# Altium PCB LPCB223R0.PcbDoc
Units mm, origin at the board's own origin, x right, y up, seen from the top; angles counter-clockwise.
Board outline 207.5 x 165.7 mm, 2 copper layers (Top Layer, Bottom Layer); 61 components, 43 nets, 301 pads, 42 vias.
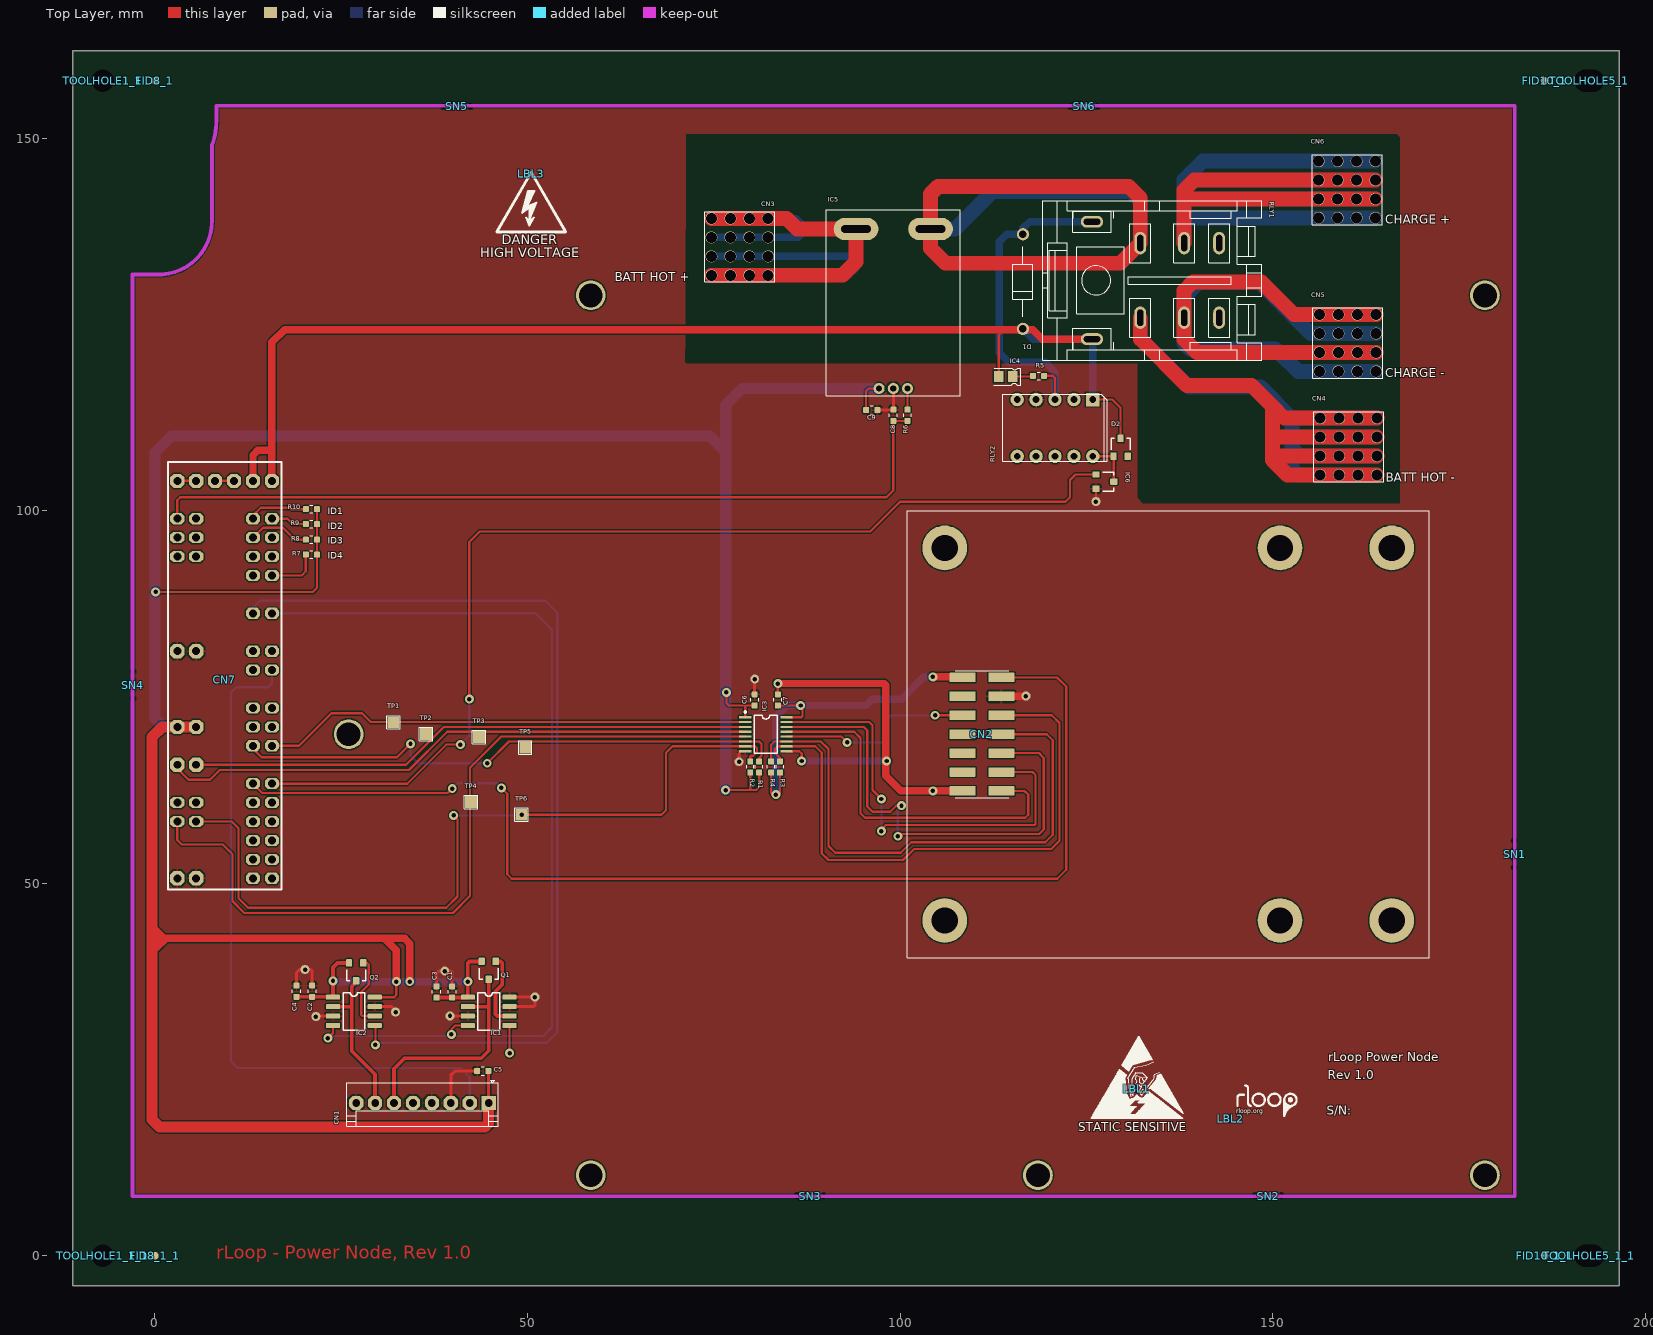
[diagram p0: Top Layer view]
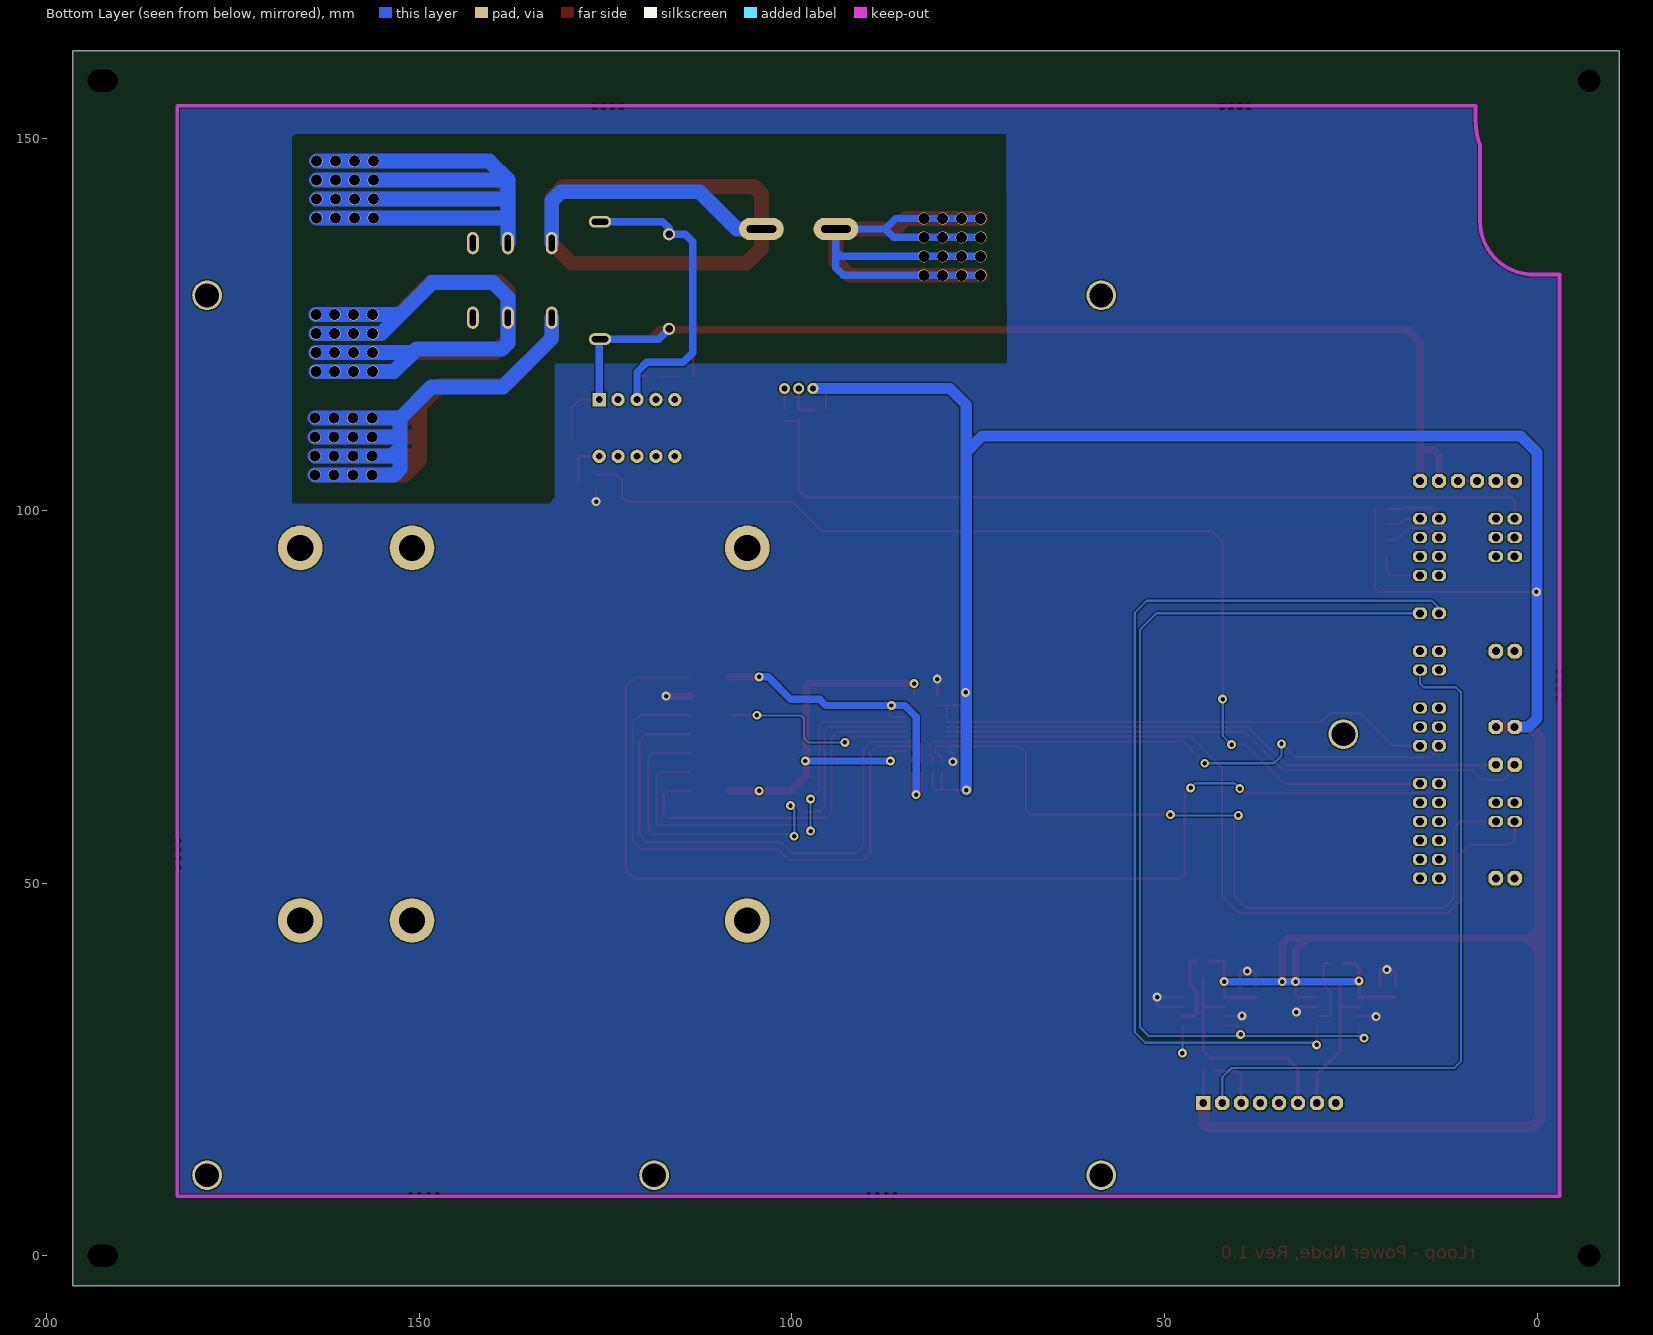
[diagram p1: Bottom Layer view, seen from below]

## Layer stack, top to bottom
Top Layer: signal copper 0.0356
Dielectric: core 0.32, FR-4, Dk 4.8
Bottom Layer: signal copper 0.0356

## Board outline
-11,-4 196.5,-4 196.5,161.695 -11,161.695

## Design rules (kind name [scope] priority, off if disabled: settings)
Clearance [All] p1: gap=0.16
HoleSize [All] p1: absolutevalues=TRUE maxlimit=5 minlimit=0.025 maxpercent=80.000 minpercent=20.000
MinimumSolderMaskSliver [All] p1 off: minsoldermaskwidth=0.1
PlaneClearance [All] p1: clearance=0.6
PolygonConnect [IsVia] p1: connectstyle=Direct reliefconductorwidth=0.254 reliefentries=4 polygonreliefangle="90 Angle" airgapwidth=0.254
PolygonConnect PolygonConnect_1 [All] p2: connectstyle=Relief reliefconductorwidth=0.254 reliefentries=4 polygonreliefangle="90 Angle" airgapwidth=0.254
RoomDefinition "LPCB223 - OVERVIEW" [InComponentClass('LPCB223 - OVERVIEW')] p1: confinementstyle=ConfineIn formatcopy=TRUE lockcomponents=FALSE outline -79.611,-126.179 -28.811,-126.179 -28.811,-100.779 -79.611,-100.779
RoomDefinition "U_LPCB223 - CHARGER IF" [InComponentClass('U_LPCB223 - CHARGER IF')] p2: confinementstyle=ConfineIn formatcopy=TRUE lockcomponents=FALSE outline -79.611,-126.179 -28.811,-126.179 -28.811,-100.779 -79.611,-100.779
RoomDefinition "U_LPCB223 - 24V POWER" [InComponentClass('U_LPCB223 - 24V POWER')] p3: confinementstyle=ConfineIn formatcopy=TRUE lockcomponents=FALSE outline -79.611,-126.179 -28.811,-126.179 -28.811,-100.779 -79.611,-100.779
RoomDefinition "U_LPCB223 - CORE INTERFACE" [InComponentClass('U_LPCB223 - CORE INTERFACE')] p4: confinementstyle=ConfineIn formatcopy=TRUE lockcomponents=FALSE outline -79.611,-126.179 -28.811,-126.179 -28.811,-100.779 -79.611,-100.779
RoomDefinition "U_LPCB223 - BMS INTERFACE" [InComponentClass('U_LPCB223 - BMS INTERFACE')] p5: confinementstyle=ConfineIn formatcopy=TRUE lockcomponents=FALSE outline -79.611,-126.179 -28.811,-126.179 -28.811,-100.779 -79.611,-100.779
RoomDefinition "U_LPCB223 - 1 WIRE DRIVER" [InComponentClass('U_LPCB223 - 1 WIRE DRIVER')] p6: confinementstyle=ConfineIn formatcopy=TRUE lockcomponents=FALSE outline -79.611,-126.179 -28.811,-126.179 -28.811,-100.779 -79.611,-100.779
RoutingVias [All] p1: holewidth=0.6 width=1.2 viastyle="Through Hole" minholewidth=0.6 minwidth=1.2 maxholewidth=1 maxwidth=3
SilkToSilkClearance [All] p1 off: silktosilkclearance=0.254
SilkToSolderMaskClearance [IsPad] p1 off: minsilkscreentomaskgap=0.254 clearancetoexposedcopper=TRUE
SolderMaskExpansion [All] p1: expansion=0.102
Width [All] p1: maxlimit=2 minlimit=0.254 preferedwidth=0.254
23 further rules are at their usual default settings.

## Classes and differential pairs
component class "U_LPCB223 - CORE INTERFACE": CN7 R7 R8 R9 R10
component class "U_LPCB223 - CHARGER IF": C8 C9 CN3 CN4 CN5 CN6 D1 D2 IC4 IC5 IC6 R5 R6 RLY1 RLY2
component class "U_LPCB223 - BMS INTERFACE": C6 C7 CN2 IC3 R1 R2 R3 R4 TP1 TP2 TP3 TP4 TP5 TP6
component class "U_LPCB223 - 24V POWER": CN1
component class "U_LPCB223 - 1 WIRE DRIVER": C1 C2 C3 C4 C5 IC1 IC2 Q1 Q2
component class "LPCB223 - OVERVIEW": LBL1 LBL2 SN1 SN2 SN3 SN4 SN5 SN6

## Components (designator, comment, footprint, x,y, rotation, side; value= is the part's Value field where it differs from the comment)
C1 "100n / 50V / 10% / SMD 0603" LFP011__CC1608-0603-IPC7351_B 39.9,35.4 r90 top
C2 "100n / 50V / 10% / SMD 0603" LFP011__CC1608-0603-IPC7351_B 21.1,35.5 r90 top
C3 "1uF / 10V / 10% / SMD 0603" LFP011__CC1608-0603-IPC7351_B 37.8,35.4 r90 top
C4 "1uF / 10V / 10% / SMD 0603" LFP011__CC1608-0603-IPC7351_B 19,35.5 r90 top
C5 "1uF / 10V / 10% / SMD 0603" LFP011__CC1608-0603-IPC7351_B 44,24.8 r180 top
C6 "100n / 50V / 10% / SMD 0603" LFP011__CC1608-0603-IPC7351_B 80.5,74.6 r90 top
C7 "100n / 50V / 10% / SMD 0603" LFP011__CC1608-0603-IPC7351_B 83.6,74.6 r90 top
C8 "10pF / 50V / 5% / SMD 0603" LFP011__CC1608-0603-IPC7351_B 99.1,112.8 r90 top
C9 "100nF / 50V / 10% / SMD 0603" LFP011__CC1608-0603-IPC7351_B 96.2,113.5 r0 top
CN1 "640456-8" 640456-8 35.9,20.5 r180 top
CN2 "1241050-7" 1241050-7 111,70 r90 top locked
CN3 "7461383" 7461383 78.5,135.4 r0 top
CN4 "7461383" 7461383 160.2,108.6 r0 top
CN5 "7461383" 7461383 160.1,122.5 r0 top
CN6 "7461383" 7461383 160,143.1 r0 top
CN7 "RLOOP_NODE_CORE" RLOOP_NODE_CORE 3,104 r270 top locked
D1 "1N4004" DO-41 116.5,137.1 r270 top
D2 "BAS16" LFP021__SOT23 129.6,108.5 r0 top
FID8_1 "FIDUCIAL" FIDTOP 0,157.695 r0 top
FID8_1_1 "FIDUCIAL" FIDTOP 0,0 r0 top
FID10_1 "FIDUCIAL" FIDTOP 186.5,157.695 r0 top
FID10_1_1 "FIDUCIAL" FIDTOP 186.5,0 r0 top
IC1 "DS2482S-100+T&R" LFP069__R-8G 44.8,32.8 r270 top
IC2 "DS2482S-100+T&R" LFP069__R-8G 26.7,32.8 r270 top
IC3 "MAX14850AEE+" LFP137__PW016 82,70 r270 top
IC4 "EL-17-21VGC/TR8" CR2012-0805-LED 114.2,118 r180 top
IC5 "ACS759LCB-050B-PFF-T" CB-PFF 99.1,116.4 r0 top
IC6 "NUD3124LT1G" LFP021__SOT23 127.5,103.9 r270 top
LBL1 "STATIC LABEL" STATIC_LABEL 131.8,22.4 r0 top
LBL2 "RLOOP_LOGO" RLOOP_LOGO 144.4,18.4 r0 top
LBL3 "MAINS POWER LABEL" "MAINS POWER LABEL" 50.5,145.2 r0 top (schematic designator LBL1)
Q1 "BSS84" LFP021__SOT23 44.8,38.3 r180 top
Q2 "BSS84" LFP021__SOT23 27,38.1 r180 top
R1 "10K / 0.1W / 1% / SMD 0603" LFP020__CR1608-0603-IPC7351_B 81.1,65.6 r270 top
R2 "10K / 0.1W / 1% / SMD 0603" LFP020__CR1608-0603-IPC7351_B 79.9,65.6 r270 top
R3 "10K / 0.1W / 1% / SMD 0603" LFP020__CR1608-0603-IPC7351_B 83.9,65.6 r270 top
R4 "10K / 0.1W / 1% / SMD 0603" LFP020__CR1608-0603-IPC7351_B 82.7,65.6 r270 top
R5 "4.7K / 0.1W / 1% / SMD 0603" LFP020__CR1608-0603-IPC7351_B 118.6,118.1 r180 top
R6 "47R / 0.1W / 1% / SMD 0603" LFP020__CR1608-0603-IPC7351_B 101,112.8 r90 top
R7 "0R / 0.1W / SMD 0603" LFP020__CR1608-0603-IPC7351_B 21,94.1 r0 top
R8 "0R / 0.1W / SMD 0603" LFP020__CR1608-0603-IPC7351_B 21,96.1 r0 top
R9 "0R / 0.1W / SMD 0603" LFP020__CR1608-0603-IPC7351_B 21,98.2 r0 top
R10 "0R / 0.1W / SMD 0603" LFP020__CR1608-0603-IPC7351_B 21,100.2 r0 top
RLY1 "K10P-11D15-24" K10P-11D15-24 134.3,130.9 r270 top
RLY2 "TQ2-24" TQ2 120.8,111.1 r180 top
SN1 "PCB_SNAPOUT" SNAPOUT_NEW 182.5,52.1 r90 top
SN2 "PCB_SNAPOUT" SNAPOUT_NEW 151.2,8 r180 top
SN3 "PCB_SNAPOUT" SNAPOUT_NEW 89.75,8 r180 top
SN4 "PCB_SNAPOUT" SNAPOUT_NEW -3,74.8 r90 top
SN5 "PCB_SNAPOUT" SNAPOUT_NEW 42.3,154.3 r180 top
SN6 "PCB_SNAPOUT" SNAPOUT_NEW 126.5,154.3 r180 top
TOOLHOLE1_1 "Comment" TOOL-1#1 -7,157.695 r0 top
TOOLHOLE1_1_1 "Comment" TOOL-1#1 -7,0 r0 top
TOOLHOLE5_1 "Comment" TOOL-1#2 192.5,157.695 r0 top
TOOLHOLE5_1_1 "Comment" TOOL-1#2 192.5,0 r0 top
TP1 "SMD_TP" SMD-TP 32,71.6 r0 top
TP2 "SMD_TP" SMD-TP 36.4,70 r0 top
TP3 "SMD_TP" SMD-TP 43.5,69.6 r0 top
TP4 "SMD_TP" SMD-TP 42.4,60.9 r0 top
TP5 "SMD_TP" SMD-TP 49.7,68.2 r0 top
TP6 "SMD_TP" SMD-TP 49.2,59.2 r0 top

## Footprints (in the part's own frame and the unit in brackets; to place one, negate y for a bottom-side part, rotate by r counter-clockwise, add the part's x,y. Pads: shape width x height; smd on the part's side, far side on the other; paste and mask are expansions set on the pad)
640456-8 [mm] "Connector, Male Header, 8 Way"
  rect 1.905x1.905 hole 1.02: 1(-8.89,0)
  oct 1.905x1.905 hole 1.02: 2(-6.35,0) 3(-3.81,0) 4(-1.27,0) 5(1.27,0) 6(3.81,0) 7(6.35,0) 8(8.89,0)
  silkscreen extent -10.15,-3.04 10.17,3.1
1241050-7 [mm]
  rrect10% 1.27x3.5 smd paste-0.01: 1(-7.62,-2.605) 2(-7.62,2.605) 3(-5.08,-2.605) 4(-5.08,2.605) 5(-2.54,-2.605) 6(-2.54,2.605) 7(0,-2.605) 8(0,2.605) 9(2.54,-2.605) 10(2.54,2.605) 11(5.08,-2.605) 12(5.08,2.605) 13(7.62,-2.605) 14(7.62,2.605)
  silkscreen extent -8.54,-3.6 8.54,3.6
7461383 [mm]
  round 1.6 hole 1.48: 1(-3.81,-3.81) 1(-3.81,-1.27) 1(-3.81,1.27) 1(-3.81,3.81) 1(-1.27,-3.81) 1(-1.27,-1.27) 1(-1.27,1.27) 1(-1.27,3.81) 1(1.27,-3.81) 1(1.27,-1.27) 1(1.27,1.27) 1(1.27,3.81) 1(3.81,-3.81) 1(3.81,-1.27) 1(3.81,1.27) 1(3.81,3.81)
  silkscreen extent -4.7,-4.7 4.7,4.7
CB-PFF [mm]
  round 1.5 hole 0.85: 1(-1.91,0) 2(0,0) 3(1.91,0)
  oval 6x3 hole 1 slot 4 at 0 deg: A(-5,21.4) B(5,21.4)
  silkscreen extent -9,-1 9,24
CR2012-0805-LED [mm]
  rect 1.3x1.5 smd: A(0.95,0) K(-0.95,0)
  silkscreen extent -2.01,-1.14 1.63,1.14
DO-41 [mil]
  round 65 hole 40: A(0,0) K(500,0)
  silkscreen extent 65,-53 435,53
FIDTOP [mil]
  round 40 smd mask+39.37: 1(0,0)
K10P-11D15-24 [mm]
  oval 3x1.6 hole 0.8 slot 2.2 at 0 deg: 1(5.005,8.535) 2(-5.005,8.535) 3(5.005,3.835) 4(-5.005,3.835) 5(5.005,-2.055) 6(-5.005,-2.055)
  oval 1.6x3 hole 0.8 slot 2.2 at 90 deg: A(7.875,-8.535) B(-7.875,-8.535)
  silkscreen extent -10.73,-15.17 10.71,14.24
LFP011__CC1608-0603-IPC7351_B [mm]
  rrect25% 0.8x0.8 smd: 1(-0.75,0) 2(0.75,0)
  silkscreen extent -0.2,-0.55 0.2,0.55
LFP020__CR1608-0603-IPC7351_B [mm]
  rrect25% 0.8x0.8 smd: 1(-0.75,0) 2(0.75,0)
  silkscreen extent -0.2,-0.5 0.2,0.5
LFP021__SOT23 [mm] "SOT-23; 3 Leads; Body 3.0 x 2.5 mm, inc. leads (LxW max)"
  rrect25% 0.85x1 smd paste-0.05: 1(-0.95,-1.2) 2(0.95,-1.2) 3(0,1.2)
  silkscreen extent -1.27,-0.3 1.28,1.2
LFP069__R-8G [mm] "Small Outline; 8 Leads; Body Width 3.9 mm; Pitch 1.27 mm"
  rrect25% 0.65x1.9 smd paste-0.05: 1(-1.905,-2.8) 2(-0.635,-2.8) 3(0.635,-2.8) 4(1.905,-2.8) 5(1.905,2.8) 6(0.635,2.8) 7(-0.635,2.8) 8(-1.905,2.8)
  silkscreen extent -2.52,-1.45 2.52,1.45
LFP137__PW016 [mm] "Shrink Small Outline; 16 Leads; Body Width 4.4 mm; Pitch 0.65 mm"
  rrect10% 0.3x1.65 smd paste-0.03: 1(-2.275,-2.775) 2(-1.625,-2.775) 3(-0.975,-2.775) 4(-0.325,-2.775) 5(0.325,-2.775) 6(0.975,-2.775) 7(1.625,-2.775) 8(2.275,-2.775) 9(2.275,2.775) 10(1.625,2.775) 11(0.975,2.775) 12(0.325,2.775) 13(-0.325,2.775) 14(-0.975,2.775) 15(-1.625,2.775) 16(-2.275,2.775)
  silkscreen extent -3.1,-2.9 2.55,1.55
"MAINS POWER LABEL" [mm]
  silkscreen extent -4.62,-7.79 4.62,0.21
RLOOP_LOGO [mm]
  silkscreen extent 0.89,0.39 8.82,4.45
RLOOP_NODE_CORE [mil]
  oct 59.06x75 hole 42: A10(200,0) A11(200,100) A12(300,0) A13(300,100) A14(400,0) AGND(400,100) ID1(200,400) ID2(200,500) ID3(300,400) ID4(500,500) ID5(500,400) ID6(400,500) ID7(400,400) ID8(300,500) SCL(700,500) SDA(700,400) T0(900,400) T1(900,500) T2(1000,400) T5(1000,500) T6(1200,400) T7(1200,500) T8(1300,400) T9(1300,500) T10(1400,400) T11(1400,500) T14(1600,400) T15(1600,500) T16(1700,400) T17(1700,500) T20(1800,400) T21(1800,500) T22(1900,400) T23(1900,500) T24(2000,400) T25(2000,500) T26(2100,400) T27(2100,500) T28(1700,0) T31(1700,100) T32(1800,0) T33(1800,100)
  oct 75x75 hole 42: D3V31(1300,0) D3V32(1300,100) D12V1(0,300) D12V2(0,200) GND1(2100,100) GND2(2100,0) GND3(900,100) GND4(900,0) P5V1(0,0) P5V2(0,100) P24V1(0,400) P24V2(0,500) T12(1500,0) T13(1500,100)
  silkscreen extent -100,-50 2160,550
SMD-TP [mm]
  rect 1.6x1.6 smd paste-2: 1(0,0)
  silkscreen extent -0.9,-0.9 0.9,0.9
SNAPOUT_NEW [mm]
  round 0.4 hole 0.8 unplated: 0(0,0) 0(1.2,0) 0(2.4,0) 0(3.6,0)
STATIC_LABEL [mm]
  silkscreen extent -6.16,-3.95 6.18,7.02
TOOL-1#1 [mm]
  round 2.54 hole 3 unplated: TOOL(0,0)
TOOL-1#2 [mm]
  round 0.076 hole 3 slot 4 at 0 deg unplated: TOOL1(0,0)
TQ2 [mm]
  rect 1.8x1.8 hole 0.9: 1(-5.08,-3.81)
  round 1.8 hole 0.9: 2(-2.54,-3.81) 3(0,-3.81) 4(2.54,-3.81) 5(5.08,-3.81) 6(5.08,3.81) 7(2.54,3.81) 8(0,3.81) 9(-2.54,3.81) 10(-5.08,3.81)
  silkscreen extent -7,-4.5 7,4.5

## Part data
C1 C2 C6 C7 C9: "Capacitor, Ceramic Chip, 100nF (0.1uF), 50V, 5%, SMD 0603 [LCA016]"
C3 C4 C5: "Capacitor, Ceramic Chip, 1uF, 10V, SMD 0603 [LCA070]"
C8: "Capacitor, Ceramic Chip, 10pF, 50V, 5%, SMD 0603 [LCA019]"
CN1: "Connector, Male Header, 8 Way"
CN2: "Connector, Header, 2.54mm, 7 Pins x 2 Rows, SMD"
CN3 CN4 CN5 CN6: "Terminal, Bush with M5 Shank"
CN7: "rLoop Node Core Connector"
D1: "Diode, General Purpose Rectifier, 1A, PTH [LIC010]"
D2: "Diode, Small Signal, 0.2A, 85V, SMD SOT-23 [LIC006]"
IC1 IC2: "IC, I2C to 1 Wire Bridge, SMD SOIC8"
IC3: "IC, 6 Channel Digital Isolator, SMD [LIC572]"
IC4: "LED, SMD, 0805 Green [LIC016]"
IC5: "IC, Hall Effect Current Sensor, PTH"
IC6: "IC, Relay Driver, 28V Industrial, SMD SOT23 [LIC292]"
Q1 Q2: "FET, P Channel, Logic Level, SMD SOT23 [LIC215]"
R1 R2 R3 R4: "Resistor, Ceramic Chip, 10K, 0.1W, 1%, SMD 0603 [LRE030]"
R5: "Resistor, Ceramic Chip, 4K7, 0.1W, 1%, SMD 0603 [LRE058]"
R6: "Resistor, Ceramic Chip, 47R, 0.1W, 1%, SMD 0603 [LRE037]"
R7 R8 R9 R10: "Resistor, Ceramic Chip, 0R, 0.1W, SMD 0603 [LRE026]"
RLY1: "Relay, DPDT, 24V, Socket Mount"
RLY2: "Relay, DPDT, Non Latching, 24VDC Coil, 1A Rating, PTH"
TP1 TP2 TP3 TP4 TP5 TP6: "SMD Test Point"

## Free pads (board coordinates)
  round 6 hole 3.5: 0(106,45) 0(106,95) 0(151,45) 0(151,95) 0(166,45) 0(166,95)
  round 4 hole 3.2: B(26,70) B(58.5,10.8) B(58.5,128.9) B(118.5,10.8) B(178.5,10.8) B(178.5,128.9)

## Via types
v1: diameter 1.2, hole 0.6, Top Layer to Bottom Layer, 42 vias

## Nets (pads, with @x,y where several pads share a name; then routed paths per layer and width w, separated by ;. In a path a pad name is that pad's centre, name@x,y a point inside that pad or via, vN(x,y) a via of type N, cw(c..) or ccw(c..) an arc to the next point about the centre after c; other vN are vias at no path point)
AGND: CN7.AGND
BATT_N_HOT: CN4.1 RLY1.5 | length 170.5
  Top Layer w2: RLY1.5 132.245,123.055 138.5,116.8 147.2,116.8 150,114 ; CN4.1@164.01,104.79 161.47,104.79 158.93,104.79 156.39,104.79 152.01,104.79 150,106.8 ; CN4.1@164.01,107.33 161.47,107.33 158.93,107.33 156.39,107.33 150.53,107.33 150,106.8 ; CN4.1@164.01,109.87 161.47,109.87 158.93,109.87 156.39,109.87 150.53,109.87 150,110.4 ; CN4.1@164.01,112.41 161.47,112.41 158.93,112.41 156.39,112.41 151.59,112.41 150,114 ; 150,106.8 150,110.4 ; 150,110.4 150,114
  Bottom Layer w2: RLY1.5 132.245,123.155 138.8,116.6 148.4,116.6 152.59,112.41 ; CN4.1@164.01,104.79 161.47,104.79 158.93,104.79 156.39,104.79 153.41,104.79 152.59,105.61 152.59,108.41 ; CN4.1@164.01,107.33 161.47,107.33 158.93,107.33 156.39,107.33 153.67,107.33 152.59,108.41 ; CN4.1@164.01,109.87 161.47,109.87 158.93,109.87 156.39,109.87 153.03,109.87 152.59,110.31 ; CN4.1@164.01,112.41 161.47,112.41 158.93,112.41 156.39,112.41 152.59,112.41 ; 152.59,108.41 152.59,110.31 ; 152.59,110.31 152.59,112.41
BATT_P_HOT: CN3.1 IC5.A | length 122.5
  Top Layer w2: CN3.1@74.69,131.59 77.23,131.59 79.77,131.59 82.31,131.59 92.29,131.59 94.1,133.4 IC5.A 86.2,137.8 84.79,139.21 82.31,139.21 79.77,139.21 77.23,139.21 CN3.1@74.69,139.21
  Bottom Layer w1: CN3.1@74.69,131.59 77.23,131.59 79.77,131.59 82.31,131.59 93.09,131.59 94.1,132.6 94.1,134.8 ; CN3.1@74.69,134.13 77.23,134.13 79.77,134.13 82.31,134.13 93.43,134.13 94.1,134.8 ; CN3.1@74.69,136.67 77.23,136.67 79.77,136.67 82.31,136.67 86.37,136.67 87.5,137.8 ; CN3.1@74.69,139.21 77.23,139.21 79.77,139.21 82.31,139.21 86.09,139.21 87.5,137.8 ; 87.5,137.8 IC5.A 94.1,134.8
BMS_3V3: C7.1 CN2.14 IC3.16 R3.2 R4.2 | length 51.4
  Top Layer w0.3: R4.2 82.7,62.1 82.9,61.9 v1(83.35,61.9) 83.8,61.9 83.9,62 R3.2 ; C7.1 v1(86.65,73.85) 86.9,73.6 86.9,72.4 86.775,72.275 IC3.16
  Top Layer w1: v1(104.4,77.7) 108.315,77.7 CN2.14
  Bottom Layer w1: v1(83.35,61.9) 83.35,72.35 84.85,73.85 v1(86.65,73.85) 95.45,73.85 96.3,74.7 100.2,74.7 103.2,77.7 v1(104.4,77.7)
BMS_GND: C7.2 CN2.2 IC3.9 | length 53.9
  Top Layer w0.3: C7.2 v1(83.6,76.8) ; IC3.9 86.475,67.725 86.8,67.4 v1(86.8,66.4)
  Top Layer w1: v1(83.6,76.8) 97.9,76.8 98.1,76.6 98.1,64.4 100.1,62.4 v1(104.4,62.4) 104.42,62.38 CN2.2
  Bottom Layer w1: v1(86.8,66.4) v1(98.2,66.4)
BMS_IRQ_OUT: CN2.9 IC3.10 R3.1 | length 79.6
  Top Layer w0.3: R3.1 83.9,66.8 83.2,67.5 83.2,68 83.575,68.375 IC3.10 88.625,68.375 89.5,67.5 89.5,54 90.4,53.1 100.4,53.1 101.9,54.6 120.3,54.6 121.4,55.7 121.4,71.5 120.36,72.54 CN2.9
BMS_MISO_OUT: CN2.1 IC3.13 | length 49.8
  Top Layer w0.3: IC3.13 93.875,70.325 94.7,69.5 94.7,59.4 95.3,58.8 116.8,58.8 117.2,59.2 117.2,61.9 116.72,62.38 CN2.1
BMS_MOSI_OUT: CN2.3 IC3.15 | length 61.4
  Top Layer w0.3: IC3.15 95.875,71.625 96.3,71.2 96.3,62.5 ; 96.3,64.7 96.3,62.5 ; v1(97.5,57) 97.3,57 98.1,57.8 118.1,57.8 118.2,57.9 118.2,64.5 117.78,64.92 CN2.3 ; v1(97.5,61.3) 96.3,62.5
  Bottom Layer w0.3: v1(97.5,57) v1(97.5,61.3)
BMS_NCS_OUT: CN2.7 IC3.11 R4.1 | length 74.9
  Top Layer w0.3: R4.1 82.7,68.6 83.125,69.025 IC3.11 89.375,69.025 90.4,68 90.4,55 91.3,54.1 100.1,54.1 101.5,55.5 119.5,55.5 120.5,56.5 120.5,69.2 119.7,70 CN2.7
BMS_PWR_AVAIL_OUT: CN2.10 IC3.12 | length 27
  Top Layer w0.3: IC3.12 92.125,69.675 v1(92.9,68.9) ; v1(104.7,72.54) CN2.10
  Bottom Layer w0.3: v1(92.9,68.9) 97.8,68.9 98.4,69.5 98.4,72.1 98.8,72.5 104.66,72.5 v1(104.7,72.54)
BMS_SCK_OUT: CN2.5 IC3.14 | length 66.3
  Top Layer w0.3: IC3.14 95.125,70.975 95.6,70.5 95.6,60.3 96.3,59.6 98.7,59.6 99.5,60.4 v1(100.2,60.4) ; v1(99.7,56.3) 99.9,56.3 100.2,56.6 118.7,56.6 119.3,57.2 119.3,66.8 118.64,67.46 CN2.5
  Bottom Layer w0.3: v1(99.7,56.3) 99.7,59.9 v1(100.2,60.4)
CHARGE_N_HOT: CN5.1 RLY1.3 | length 148.4
  Top Layer w2: CN5.1@163.91,121.23 161.37,121.23 158.83,121.23 156.29,121.23 139.87,121.23 138.135,122.965 RLY1.3 138.135,129.535 139.3,130.7 148.5,130.7 152.89,126.31 156.29,126.31 158.83,126.31 161.37,126.31 CN5.1@163.91,126.31
  Bottom Layer w2: CN5.1@163.91,118.69 161.37,118.69 158.83,118.69 156.29,118.69 153.41,118.69 150.87,121.23 ; CN5.1@163.91,121.23 161.37,121.23 158.83,121.23 156.29,121.23 150.87,121.23 ; CN5.1@163.91,123.77 161.37,123.77 158.83,123.77 156.29,123.77 155.13,123.77 152.59,126.31 ; CN5.1@163.91,126.31 161.37,126.31 158.83,126.31 156.29,126.31 152.59,126.31 ; 150.87,121.23 150.4,121.7 138.9,121.7 138.135,122.465 RLY1.3 138.135,128.635 140.1,130.6 148.3,130.6 152.59,126.31
CHARGE_P_HOT: CN6.1 RLY1.4 | length 171.5
  Top Layer w2: RLY1.4 138.135,141.9 ; CN6.1@163.81,141.83 161.27,141.83 158.73,141.83 156.19,141.83 138.205,141.83 138.135,141.9 ; CN6.1@163.81,144.37 161.27,144.37 158.73,144.37 156.19,144.37 139.47,144.37 138.135,143.035 138.135,141.9
  Bottom Layer w2: RLY1.4 138.135,139.2 ; CN6.1@163.81,139.29 161.27,139.29 158.73,139.29 156.19,139.29 138.225,139.29 138.135,139.2 ; CN6.1@163.81,141.83 161.27,141.83 158.73,141.83 156.19,141.83 138.405,141.83 138.135,142.1 ; CN6.1@163.81,144.37 161.27,144.37 158.73,144.37 156.19,144.37 138.2,144.37 138.135,144.435 ; CN6.1@163.81,146.91 161.27,146.91 158.73,146.91 156.19,146.91 140.61,146.91 138.135,144.435 ; 138.135,139.2 138.135,142.1 ; 138.135,142.1 138.135,144.435
D3V3A: C1.1 C2.1 C3.1 C4.1 C5.1 C6.1 C9.1 CN1.1 CN7.D3V31 CN7.D3V32 IC1.1 IC2.1 IC2.8 IC3.1 IC5.1 Q1.2 Q2.2 R1.2 R2.2 R7.2 R8.2 R9.2 R10.2 | length 450.3
  Top Layer w0.3: v1(0.1,89.1) 21.2,89.1 21.75,89.65 R7.2 R8.2 R9.2 R10.2 ; IC2.8 32.105,34.705 32.4,35 v1(32.4,36.8) ; v1(76.6,62.5) 79.9,62.5 ; v1(76.7,75.6) 76.7,74.2 77.05,73.85 79.2,73.85 ; IC3.1 79.225,73.825 79.2,73.85 ; R2.2 79.9,62.5 ; C6.1 79.2,73.85 ; R1.2 81.1,62.9 80.7,62.5 79.9,62.5 ; C9.1 95.45,116.05 95.8,116.4 IC5.1
  Top Layer w0.4: CN1.1@44.75,20.54 C5.1
  Top Layer w0.5: C4.1 23.855,34.75 IC2.1 23.9,38.7 24.5,39.3 Q2.2 ; C3.1 41.945,34.65 IC1.1 42,39.3 42.2,39.5 Q1.2
  Top Layer w1: -0.4,41.3 0.2,41.3 1.5,42.6 ; -0.4,42.6 1.2,42.6 ; -0.4,44.2 1.2,42.6 ; v1(32.4,36.8) 32.4,41 30.8,42.6 ; v1(34.2,36.8) 34.2,41.9 33.5,42.6 30.8,42.6 ; 1.2,42.6 1.5,42.6 ; 1.5,42.6 30.8,42.6
  Top Layer w1.5: CN7.D3V32 CN7.D3V31 0.98,70.98 -0.4,69.6 -0.4,44.2 -0.4,42.6 -0.4,41.3 -0.4,18.3 0.6,17.3 44.3,17.3 44.79,17.79 CN1.1
  Bottom Layer w1: v1(23.9,36.9) 24,36.8 v1(32.4,36.8) v1(34.2,36.8) v1(42,36.8)
  Bottom Layer w1.5: CN7.D3V31 1.12,70.98 0,72.1 0,107.8 2.2,110 74.5,110 76.6,107.9 ; v1(76.6,62.5) 76.6,107.9 ; IC5.1 78.8,116.4 76.6,114.2 76.6,107.9
D12VA: CN7.D12V1 CN7.D12V2 | length 2.5
  Top Layer w0.3: CN7.D12V2 CN7.D12V1
DGND: C1.2 C2.2 C3.2 C4.2 C5.2 C6.2 C8.2 C9.2 CN1.3 CN1.4 CN1.5 CN1.8 CN2.11 CN7.GND1 CN7.GND2 CN7.GND3 CN7.GND4 IC1.3 IC1.7 IC1.8 IC2.3 IC2.7 IC3.8 IC5.2 IC6.2 RLY2.4 | length 49.6
  Top Layer w0.3: 78.4,67.4 78.725,67.725 IC3.8 ; v1(126.3,101.2) IC6.2
  Top Layer w0.4: C4.2 19,38 19.4,38.4 20.9,38.4 21.1,38.2 C2.2 ; v1(21.6,32.1) 21.665,32.165 IC2.3 ; IC2.7 31.765,33.435 32.3,32.9 v1(32.3,32.7) ; C3.2 37.8,37.9 38.1,38.2 39.7,38.2 39.9,38 C1.2 ; v1(39.6,32.2) 39.635,32.165 IC1.3 ; CN1.3 39.71,24.21 40.3,24.8 C5.2 ; IC1.7 50.835,33.435 51,33.6 v1(51,34.7) 50.995,34.705 IC1.8 ; v1(78.4,66.3) 78.4,67.4 ; C6.2 v1(80.5,77.4) ; C9.2 99.05,113.5 C8.2 IC5.2
  Top Layer w1: CN2.11 116.88,75.08 v1(116.9,75.1)
  other v1: 38.9,38.2 20.15,38.4
NetC8_1: C8.1 CN7.A10 R6.1 | length 110.4
  Top Layer w0.3: CN7.A10 3,101.4 3.4,101.8 98.2,101.8 99.1,102.7 C8.1 R6.1
NetCN1_2: CN1.2 CN7.T5 | length 93.7
  Bottom Layer w0.3: CN7.T5 15.7,76.8 15.2,76.3 10.9,76.3 10.2,75.6 10.2,26.1 11.1,25.2 41,25.2 42.25,23.95 CN1.2
NetCN2_13: CN2.13 CN7.T14 | length 156.1
  Top Layer w0.3: CN7.T14 14.42,62.1 39.3,62.1 v1(39.9,62.7) ; v1(46.5,62.8) 47.3,62 47.3,51.2 47.9,50.6 121.1,50.6 122.3,51.8 122.3,76.4 121.08,77.62 CN2.13
  Bottom Layer w0.3: v1(39.9,62.7) 40.6,63.4 45.9,63.4 v1(46.5,62.8)
NetCN7_ID1: CN7.ID1 R10.1 | length 8
  Top Layer w0.3: CN7.ID1 13.16,99.36 14.2,100.4 18.1,100.4 18.3,100.2 R10.1
NetCN7_ID2: CN7.ID2 R9.1 | length 4.8
  Top Layer w0.3: CN7.ID2 17.78,98.92 18.5,98.2 R9.1
NetCN7_ID3: CN7.ID3 R8.1 | length 8.3
  Top Layer w0.3: CN7.ID3 13.18,96.38 14.5,97.7 17.2,97.7 18.8,96.1 R8.1
NetCN7_ID4: CN7.ID4 R7.1 | length 7
  Top Layer w0.3: CN7.ID4 19.7,91.3 20.25,91.85 R7.1
NetCN7_SCL: CN7.SCL IC1.4 IC2.4 | length 127.6
  Top Layer w0.3: v1(23.2,29.2) 23.9,29.9 IC2.4 ; v1(39.8,29.7) 39.8,30.4 40.295,30.895 IC1.4
  Bottom Layer w0.3: CN7.SCL 51.08,86.22 53.3,84 53.3,30.7 52.1,29.5 23.5,29.5 v1(23.2,29.2)
NetCN7_SDA: CN7.SDA IC1.5 IC2.5 | length 131.8
  Top Layer w0.3: IC2.5 29.6,30.795 v1(29.6,28.3) ; v1(47.6,27.2) IC1.5
  Bottom Layer w0.3: CN7.SDA 13.16,86.96 14.1,87.9 52.4,87.9 54,86.3 54,30 52.6,28.6 47.6,28.6 ; v1(29.6,28.3) 29.9,28.6 47.6,28.6 ; v1(47.6,27.2) 47.6,28.6
NetCN7_T10: CN7.T10 IC3.6 R1.1 TP5.1 | length 75.7
  Top Layer w0.3: CN7.T10 13.16,68.04 14.3,66.9 32.5,66.9 v1(34.3,68.7) ; v1(44.6,66.1) 47.525,69.025 IC3.6 81.075,69.025 81.4,68.7 81.4,67.1 81.1,66.8 R1.1
  Bottom Layer w0.3: v1(34.3,68.7) 34.3,67.1 35.3,66.1 v1(44.6,66.1)
NetCN7_T11: CN7.T11 IC3.2 TP1.1 | length 65.8
  Top Layer w0.3: CN7.T11 19.34,68.44 23.7,72.8 27.8,72.8 28.975,71.625 IC3.2
NetCN7_T12: CN7.T12 IC3.4 TP3.1 | length 80
  Top Layer w0.3: CN7.T12 3,65.4 4.5,63.9 7.4,63.9 8.7,65.2 34.1,65.2 39.225,70.325 IC3.4
NetCN7_T13: CN7.T13 IC3.3 TP2.1 | length 75.8
  Top Layer w0.3: CN7.T13 33.7,65.9 38.775,70.975 IC3.3
NetCN7_T15: CN7.T15 IC6.1 | length 144.4
  Top Layer w0.3: CN7.T15 33.86,63.36 39.1,68.6 v1(41,68.6) ; v1(42.2,74.7) 42.2,95.8 43.6,97.2 96,97.2 100,101.2 122.2,101.2 122.8,101.8 122.8,104.1 123.55,104.85 IC6.1
  Bottom Layer w0.3: v1(41,68.6) 42.2,69.8 v1(42.2,74.7)
NetCN7_T32: CN7.T32 IC3.5 TP4.1 | length 106.3
  Top Layer w0.3: CN7.T32 3,55.8 3.6,55.2 9.1,55.2 10.4,53.9 10.4,47.6 12,46 40,46 42.3,48.3 42.3,65.5 46.475,69.675 IC3.5
NetCN7_T33: CN7.T33 IC3.7 R2.1 TP6.1 | length 108.6
  Top Layer w0.3: CN7.T33 10.32,58.28 11.2,57.4 11.2,48 12.5,46.7 39.1,46.7 40.6,48.2 40.6,58.6 v1(40.1,59.1) ; v1(49.2,59.2) 68,59.2 68.6,59.8 68.6,67.5 69.475,68.375 IC3.7 80.525,68.375 80.8,68.1 80.8,67.6 80.3,67.1 80,67.1 79.9,67 R2.1
  Bottom Layer w0.3: v1(40.1,59.1) 49.1,59.1 v1(49.2,59.2)
NetD1_A: D1.A R5.1 RLY1.B RLY2.3 | length 45.7
  Top Layer w0.3: R5.1 120.5,118.1 120.8,117.8 RLY2.3
  Bottom Layer w1: RLY2.3 120.8,118.6 119.5,119.9 114.6,119.9 113.3,121.2 113.3,136.1 114.3,137.1 D1.A 116.5,137.9 117.375,138.775 RLY1.B
NetD2_1: D2.1 IC6.3 RLY2.10 | length 6.2
  Top Layer w0.3: RLY2.10 128.64,107.29 D2.1 128.7,107.25 IC6.3
NetIC1_6: IC1.6 Q1.1 | length 10.2
  Top Layer w0.5: Q1.1 46.4,39.5 46.6,39.3 46.6,36.4 45.7,35.5 45.7,32.4 45.935,32.165 IC1.6
NetIC2_6: IC2.6 Q2.1 | length 9.9
  Top Layer w0.3: Q2.1 28.5,39.3 28.7,39.1 28.7,36.4 27.7,35.4 27.7,32.3 27.835,32.165 IC2.6
NetIC4_K: IC4.K R5.2 | length 2.7
  Top Layer w0.3: IC4.K 117.75,118 R5.2
NetIC5_3: IC5.3 R6.2 | length 2.9
  Top Layer w0.3: R6.2 101.01,113.56 IC5.3
NetIC5_B: IC5.B RLY1.6 | length 109
  Top Layer w2: 104.1,135.2 IC5.B 104.1,142.5 105.1,143.5 130.7,143.5 132.245,141.955 RLY1.6 129.54,133.2 106.1,133.2 104.1,135.2
  Bottom Layer w2: IC5.B 107.4,137.8 112.4,142.8 131,142.8 132.245,141.555 RLY1.6
ONEWIRE_A: CN1.6 IC1.2 Q1.3 | length 30.7
  Top Layer w0.5: CN1.6 32.09,25.09 33.5,26.5 43.8,26.5 44.8,27.5 44.8,33.4 ; IC1.2 44.765,33.435 44.8,33.4 ; Q1.3 44.8,33.4
ONEWIRE_B: CN1.7 IC2.2 Q2.3 | length 20.5
  Top Layer w0.5: IC2.2 26.335,33.435 26.4,33.5 ; Q2.3 27,36.7 26.4,36.1 26.4,33.5 ; CN1.7 29.55,24.35 26.4,27.5 26.4,33.5
P5VA: CN7.P5V1 CN7.P5V2 | length 2.5
  Top Layer w0.3: CN7.P5V1 CN7.P5V2
P24VA: CN7.P24V1 CN7.P24V2 D1.K D2.3 IC4.A RLY1.A RLY2.1 | length 171.6
  Top Layer w0.3: IC4.A 113.25,123.55 114,124.3 114.1,124.4 D1.K ; RLY2.1 128.49,114.91 129.6,113.8 D2.3
  Top Layer w1: CN7.P24V1 13.16,107.46 13.8,108.1 15.7,108.1 ; CN7.P24V2 15.7,108.1 ; RLY1.A 119.075,123.025 117.8,124.3 114,124.3 17.4,124.3 15.7,122.6 15.7,108.1
  Bottom Layer w1: D1.K 117.875,123.025 RLY1.A 125.88,122.91 RLY2.1
pads on no net: CN2.4 CN2.6 CN2.8 CN2.12 CN7.A11 CN7.A12 CN7.A13 CN7.A14 CN7.ID5 CN7.ID6 CN7.ID7 CN7.ID8 CN7.T0 CN7.T1 CN7.T2 CN7.T6 CN7.T7 CN7.T8 CN7.T9 CN7.T16 CN7.T17 CN7.T20 CN7.T21 CN7.T22 CN7.T23 CN7.T24 CN7.T25 CN7.T26 CN7.T27 CN7.T28 CN7.T31 D2.2 FID8_1.1 FID8_1_1.1 FID10_1.1 FID10_1_1.1 RLY1.1 RLY1.2 RLY2.2 RLY2.5 RLY2.6 RLY2.7 RLY2.8 RLY2.9 SN1.0 SN2.0 SN3.0 SN4.0 SN5.0 SN6.0 TOOLHOLE1_1.TOOL TOOLHOLE1_1_1.TOOL TOOLHOLE5_1.TOOL1 TOOLHOLE5_1_1.TOOL1

## Polygon pours and split planes (outlines as drawn)
DGND on Top Layer "Bottom Layer-No Net" (solid, remove dead copper, pour order 3): 182.5,8 182.5,154.348 -2.748,154.348 -3,154.6 -3,8
DGND on Bottom Layer "Bottom Layer-No Net" (solid, remove dead copper, pour order 4): 182.5,8 182.5,154.348 -2.748,154.348 -3,154.6 -3,8

## Keep-outs
Keep-Out Layer:
  lines w0.5: -3,8 -3,131.695 0.5,131.695 ccw(c0.5,138.848) 7.652,138.848 7.652,149.07 ccw(c-1,152.348) 8.252,152.348 8.252,154.348 182.5,154.348 182.5,8 -3,8

## Other copper
Top Layer:
  pour cut-out: 71.3,150.5 166.7,150.5 167.1,150.1 167.1,101 132.6,101 131.9,101.7 131.9,119.8 71.3,119.8 71.2,119.9
  text "rLoop - Power Node, Rev 1.0" at 8.2,-1 h3
Bottom Layer:
  pour cut-out: 71.3,150.5 166.7,150.5 167.1,150.1 167.1,101 132.6,101 131.9,101.7 131.9,119.8 71.3,119.8 71.2,119.9

## Silkscreen, mask and mechanical layers (free items; w line width, h text height)
Top Overlay:
  lines w0.1: 101,40 171,40 171,100 101,100 101,40
  text "CHARGE +" at 165.11,138.08 h2
  text "BATT HOT +" at 61.71,130.38 h2
  text "CHARGE -" at 165.11,117.48 h2
  text "BATT HOT -" at 165.21,103.48 h2
  text "ID1" at 23.2,99.2 h1.5
  text "ID2" at 23.2,97.2 h1.5
  text "ID3" at 23.2,95.2 h1.5
  text "ID4" at 23.2,93.2 h1.5
  text "rLoop Power Node" at 157.5,25.71 h2
  text "Rev 1.0" at 157.4,23.31 h2
  text "S/N:" at 157.3,18.51 h2
Mechanical 1:
  lines w0.1: -11,-4 196.5,-4 196.5,161.695 -11,161.695 -11,-4
  lines w0.127: -3,8 182.5,8 182.5,154.348 8.252,154.348 8.252,152.348 cw(c-1,152.348) 7.652,149.07 7.652,138.848 cw(c0.5,138.848) 0.5,131.695 -3,131.695 -3,8
Mechanical 3:
  lines w2.4: -4.2,72.8 -4.2,6.8 84.6,6.8 ; -4.2,80 -4.2,132.895 0.5,132.895 ; 0.5,132.896 ccw(c0.5,138.848) 6.452,138.848 6.452,149.27 ; 6.53,149.494 ccw(c-1.005,152.349) 7.052,152.349 7.052,155.548 37.3,155.548 ; 44.5,155.548 121.3,155.548 ; 91.8,6.8 145.8,6.8 ; 128.5,155.548 183.7,155.548 183.7,57.2 ; 153,6.8 183.7,6.8 183.7,50

## Text inside footprints (layer, text, board x,y; h text height)
LBL1: Top Overlay "STATIC SENSITIVE" at 123.926,16.304 h2
LBL2: Top Overlay "rloop.org" at 145.15,18.9 h1
LBL3: Top Overlay "DANGER" at 46.563,135.294 h2.16; Top Overlay "HIGH VOLTAGE" at 43.642,133.516 h2.16